# Altium PCB PCB1.PcbDoc
Units mil, origin at the board's own origin, x right, y up, seen from the top; angles counter-clockwise.
Board outline 6000 x 4000 mil, 2 copper layers (Top Layer, Bottom Layer); 23 components, 15 nets, 60 pads, 0 vias.
Unrouted connection lines stored in the file: 31.
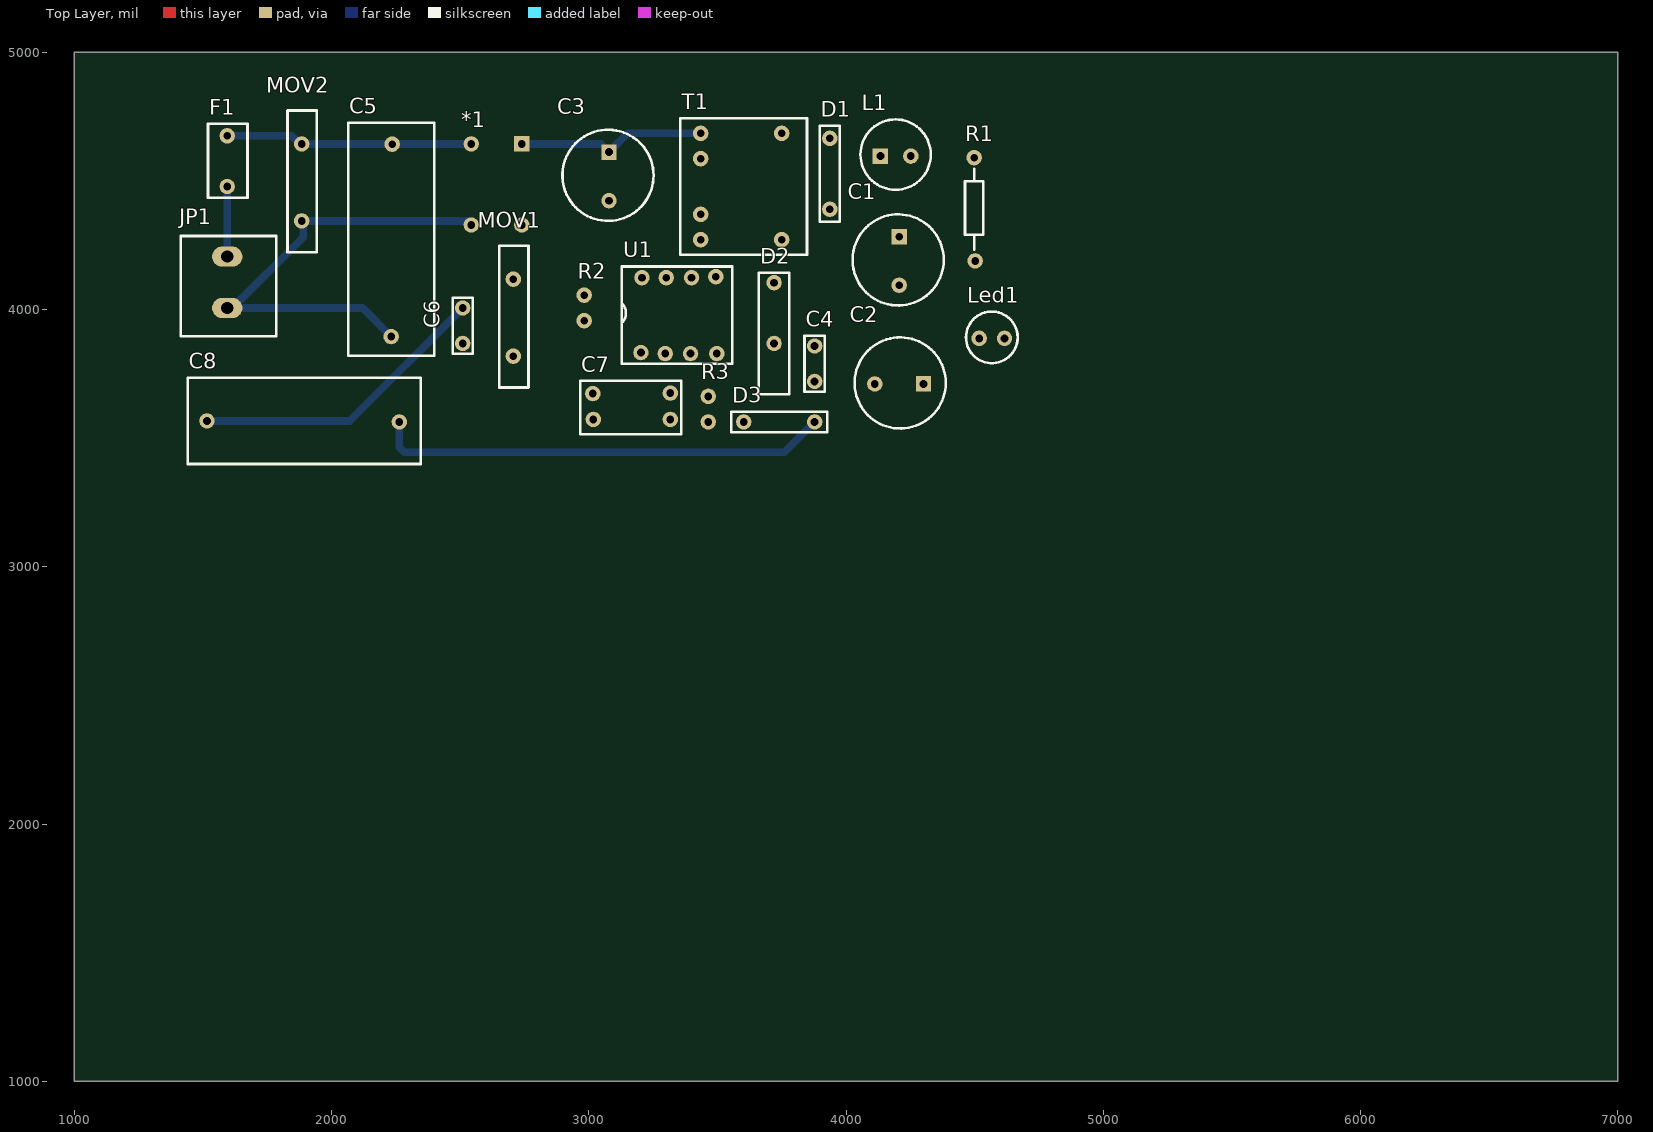
[diagram p0: Top Layer view]
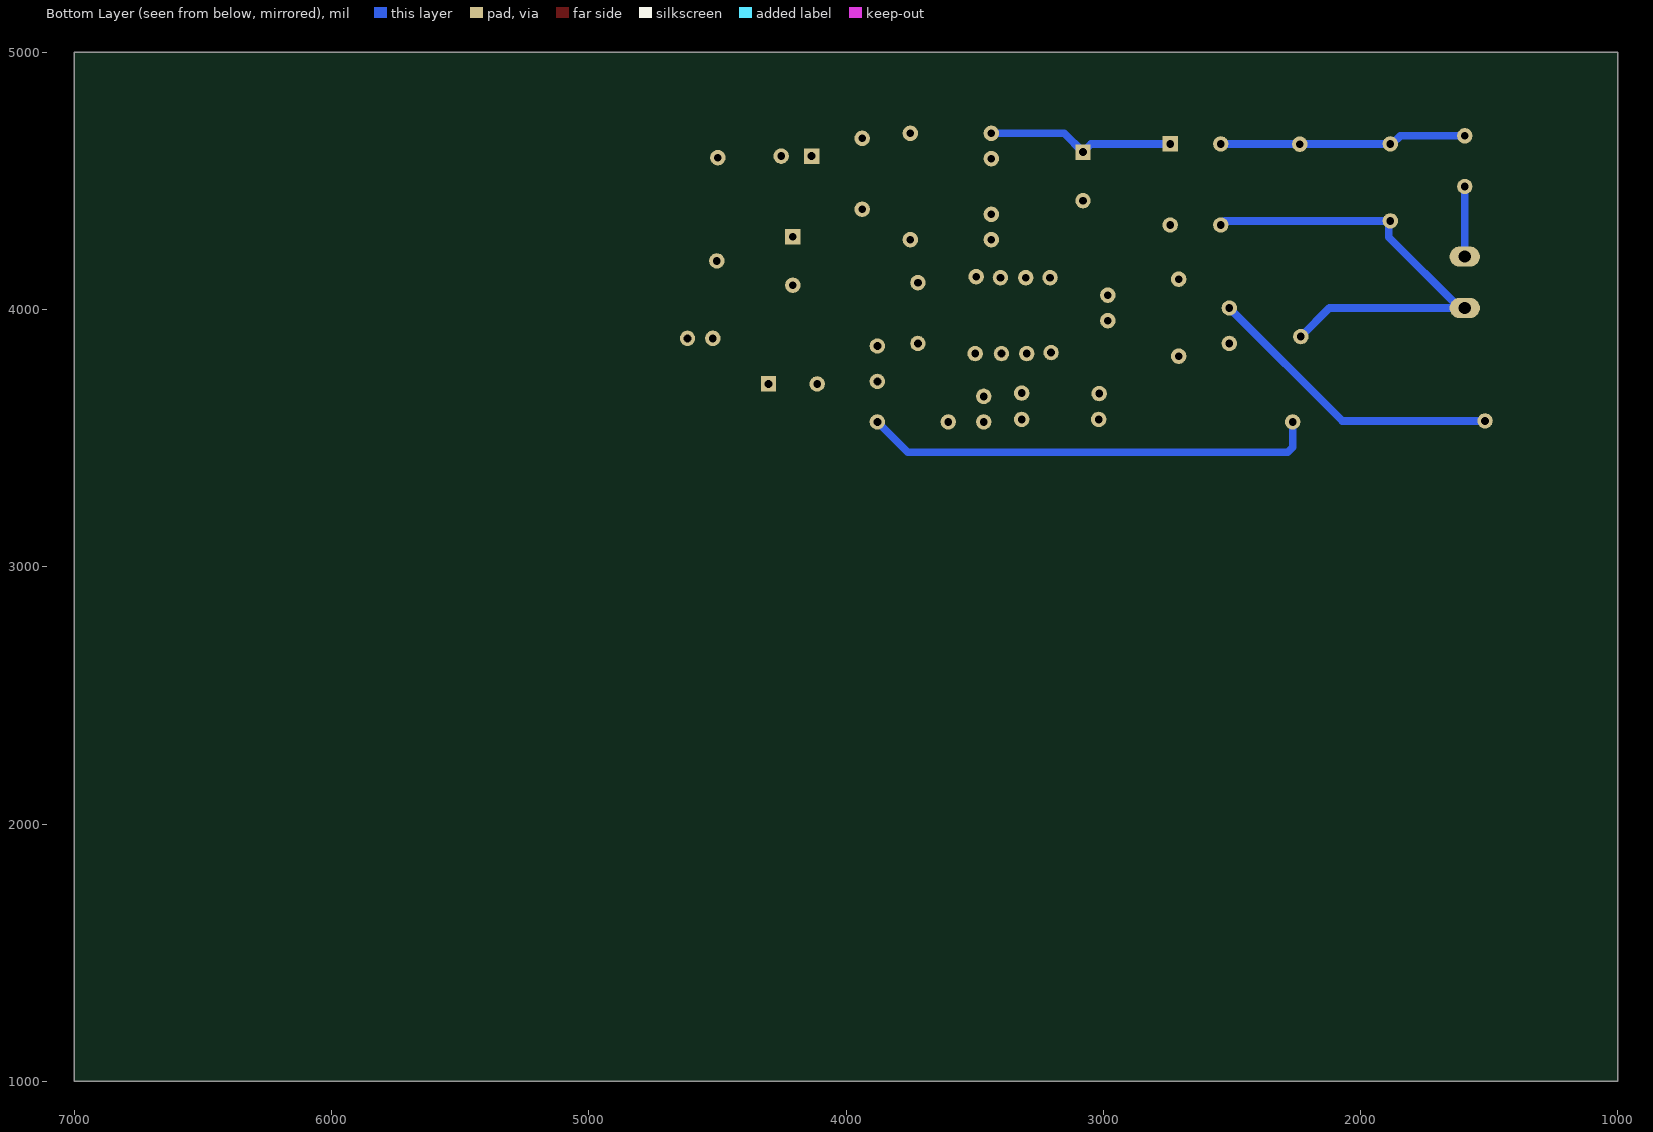
[diagram p1: Bottom Layer view, seen from below]

## Layer stack, top to bottom
Top Solder: solder mask 0.4, Solder Resist, Dk 3.5
Top Layer: signal copper 1.4
Dielectric 1: dielectric 12.6, FR-4, Dk 4.8
Bottom Layer: signal copper 1.4
Bottom Solder: solder mask 0.4, Solder Resist, Dk 3.5

## Board outline
1000,1000 7000,1000 7000,5000 1000,5000

## Design rules (kind name [scope] priority, off if disabled: settings)
Clearance [All] p1: gap=10 ignorepadtopadclearanceinfootprint=FALSE except(0: Arc-Hole Track-Hole SMDPad-Hole THPad-Hole Via-Hole Fill-Hole Poly-Hole Region-Hole Text-Hole)
PolygonConnect [All] p1: connectstyle=Relief reliefconductorwidth=10 reliefentries=4 polygonreliefangle="90 Angle" airgapwidth=10
RoomDefinition Sheet1 [InComponentClass('Sheet1')] p1: confinementstyle=ConfineIn formatcopy=TRUE lockcomponents=FALSE outline 0,0 2000,0 2000,1000 0,1000
RoutingVias [All] p1: holewidth=28 width=50 viastyle="Through Hole" minholewidth=28 minwidth=50 maxholewidth=28 maxwidth=50
SolderMaskExpansion [All] p1: expansion=4
Width [All] p1: maxlimit=40 minlimit=10 preferedwidth=15
30 further rules are at their usual default settings.

## Components (designator, comment, footprint, x,y, rotation, side; value= is the part's Value field where it differs from the comment)
*1 "Bridge diode" "bridge diode - duplicate" 2228.1,4525.59 r0 top
C1 "1000uF" "Capacitor 1000uF 25V" 4202.76,4192.91 r270 top
C2 "1000uF" "Capacitor 1000uF 25V" 4210.63,3714.57 r180 top
C3 "1000uF" "Capacitor 1000uF 25V" 3074.8,4521.65 r270 top
C4 "104" "Capacitor 104" 3877.95,3720.47 r270 top
C5 "104" "Capactor cbb" 2227.8,3894.84 r270 top
C6 "104" "Capacitor 104" 2509.84,4005.91 r90 top
C7 "Opto" Opto 3320.87,3574.8 r180 top
C8 "104" "Capactor cbb" 1515.75,3570.87 r180 top
D1 "Diode zenner" "Diode Zenner" 3937.01,4667.32 r90 top
D2 "1n4007" "Diode 1N4007" 3720.47,3907.48 r270 top
D3 "Diode zenner" "Diode Zenner" 3879.92,3562.99 r0 top
F1 "Fuse" Fuse 1594.49,4596.46 r90 top
JP1 "Header kf128" "Terminal 2" 1594.49,4205.91 r270 top
L1 "Inductor" "RLB 0712 Inductor" 4133.86,4592.52 r180 top
Led1 "Led" "LED RED" 4616.14,3887.8 r0 top
MOV1 "300 V" "Varistor 10d471k" 2702.76,3972.44 r90 top
MOV2 "300 V" "Varistor 10d471k" 1879.92,4498.03 r90 top
R1 "1k" "Resistor 1/4w" 4498.03,4389.76 r90 top
R2 "1k" "Resistor 1/4w - duplicate" 3037.41,4067.8 r90 top
R3 "1k" "Resistor 1/4w - duplicate" 3409.45,3551.18 r270 top
T1 "Transformer" Transformer 3631.89,4468.5 r0 top
U1 "TNY268PN" TNY268pn 3344.49,3986.22 r90 top

## Footprints (in the part's own frame and the unit in brackets; to place one, negate y for a bottom-side part, rotate by r counter-clockwise, add the part's x,y. Pads: shape width x height; smd on the part's side, far side on the other; paste and mask are expansions set on the pad)
"bridge diode - duplicate" [mil] "db107"
  rect 60x60 hole 30: 1(511.81,118.11)
  round 60 hole 30: 2(314.96,118.11) 3(314.96,-196.85) 4(511.81,-196.85)
  body extent 266,-197 569,118, height 150
"Capacitor 104" [mil] "Ceramic Capacitor 104"
  round 60 hole 30: 1(0,0) 2(-137.8,0)
  silkscreen extent -177,-39 39,39, body extent -170,-39 24,39, height 59
"Capacitor 1000uF 25V" [mil] "Capacitor 1000uF 25V"
  rect 60x60 hole 30: 1(-90.55,3.94)
  round 60 hole 30: 2(98.43,3.94)
  silkscreen extent -177,-177 177,177, body extent -207,-207 207,207, height 650
"Capactor cbb" [mil] "CBB81 PPS Capacitor W=23.0 H=15.5 T=8.5 P=19.0"
  round 60 hole 30: 1(0,3.94) 2(-748.03,7.87)
  silkscreen extent -831,-163 75,171, body extent -831,-163 75,171, height 433
"Diode 1N4007" [mil]
  round 60 hole 30: 1(-196.85,0) 2(39.37,0)
  silkscreen extent -236,-59 236,59, body extent -220,-54 214,54, height 146
"Diode Zenner" [mil] "Zenner 1N4148"
  round 60 hole 30: 1(-1.97,0) 2(-277.56,0)
  silkscreen extent -327,-39 47,39, body extent -287,-39 8,39, height 98
Fuse [mil]
  round 60 hole 30: 1(-118.11,0) 2(78.74,0)
  silkscreen extent -161,-79 126,75, body extent -195,-79 93,75, height 539
"LED RED" [mil] "LED RED"
  round 60 hole 30: 1(0,0) 2(-98.43,0)
  silkscreen extent -150,-96 51,104, body extent -126,-57 31,81, height 86
Opto [mil] "PC817"
  round 60 hole 30: 1(3.94,1.97) 2(3.94,-100.39) 3(303.15,1.97) 4(305.12,-98.43)
  silkscreen extent -39,-148 354,59, body extent -2,-136 309,45, height 169
"Resistor 1/4w" [mil] "Resistor 1/4w"
  round 60 hole 30: 1(-200.79,-3.94) 2(200.79,0)
  silkscreen extent -157,-35 157,35, body extent -211,-46 213,46, height 155
"Resistor 1/4w - duplicate" [mil] "Resistor 1/4w stand"
  round 60 hole 30: 1(-111.1,55.13) 2(-11.81,55.12)
  body extent -148,18 -2,91, height 285
"RLB 0712 Inductor" [mil] "Inductance range 47µH - 47mH"
  rect 60x60 hole 30: 1(0,-3.94)
  round 60 hole 30: 2(-118.11,-3.94)
  silkscreen extent -196,-147 78,127, body extent -191,-136 73,128, height 906
"Terminal 2" [mm] "KF128-2P 5.08MM"
  oval 2x3 hole 1.2: 1(0,0) 2(5.08,0)
  silkscreen extent -2.03,-4.57 7.87,4.83, body extent -2.42,-5 8.18,5.3, height 14.15
TNY268pn [mil] "TNY268pn 7pin"
  round 60 hole 30: 1(-153.54,141.73) 2(-157.48,47.24) 3(-157.48,-51.18) 4(-157.48,-153.54) 5(141.73,-149.61) 7(137.8,43.31) 8(137.8,-55.12) 8(137.8,137.8)
  silkscreen extent -197,-213 181,217, body extent -163,-213 147,217, height 239
Transformer [mil] "BAX EE10-Q7LK6 pin"
  round 60 hole 30: 1(-196.85,-196.85) 2(-196.85,-98.43) 3(-196.85,118.11) 4(-196.85,216.54) 5(118.11,216.54) 8(118.11,-196.85)
  silkscreen extent -276,-256 217,276, body extent -276,-193 217,233, height 421
"Varistor 10d471k" [mil] "Varistor 10d471k"
  round 60 hole 30: 1(-153.54,-3.94) 2(145.67,-3.94)
  silkscreen extent -276,-63 276,51, body extent -316,-144 316,144, height 768

## Part data
C1 C2 C3: library part "Capacitor Pol", "Capacitor Pol"
C4 C5 C6 C8: library part Capactor
C7: "PC817"
D2: library part Diode, "diode 1n4007"
JP1: "Header kf128 banlinhkien"
Led1: "Led Red"
MOV1 MOV2: library part "Varistor 10d471k", "Varistor mov 10d471k   12 - 300 V"
R1 R2 R3: library part Resister, "Resister"
T1: "BAX EE10-Q7LK6 pin"

## Nets (pads, with @x,y where several pads share a name; then routed paths per layer and width w, separated by ;. In a path a pad name is that pad's centre, name@x,y a point inside that pad or via, vN(x,y) a via of type N, cw(c..) or ccw(c..) an arc to the next point about the centre after c; other vN are vias at no path point)
GND: C1.2 C2.2 C4.1 C8.2 D3.1 Led1.2 T1.8 | length 1769.7
  Bottom Layer w30: C8.2 2263.78,3464.57 2283.46,3444.88 3759.84,3444.88 D3.1
Net*1_1: *1.1 C3.1 MOV1.2 R2.2 T1.4 | length 730.2
  Bottom Layer w30: *1.1@2748.03,4643.7 3047.24,4643.7 C3.1 3151.57,4685.04 T1.4
Net*1_2: *1.2 C5.2 F1.2 MOV2.2 | length 970.4
  Bottom Layer w30: F1.2 1844.24,4675.2 1875.74,4643.7 MOV2.2 1884.27,4643.29 2235.26,4643.29 C5.2 2236.5,4643.7 *1.2@2551.18,4643.7
Net*1_3: *1.3 C5.1 JP1.2 MOV2.1 | length 1812.3
  Bottom Layer w30: JP1.2 JP1.2@1614.17,4005.91 ; C5.1 2120.67,4005.91 JP1.2@1614.17,4005.91 ; *1.3@2551.18,4328.74 *1.3 2527.32,4344.49 MOV2.1 1889.76,4338.58 1889.76,4281.5 JP1.2@1614.17,4005.91
Net*1_4: *1.4 C3.2 C6.1 C7.3 C8.1 U1.2 U1.3 U1.7 U1.8 | length 1175.9
  Bottom Layer w30: C8.1 2070.87,3566.93 C6.1
NetC1_1: C1.1 C7.1 D1.2 L1.1
NetC2_1: C2.1 C4.2 L1.2 R1.2
NetC6_2: C6.2 U1.1
NetC7_2: C7.2 D3.2 R3.1
NetC7_4: C7.4 U1.4
NetD1_1: D1.1 T1.5
NetD2_1: D2.1 T1.3 U1.5
NetD2_2: D2.2 MOV1.1 R2.1
NetF1_1: F1.1 JP1.1 | length 272.4
  Bottom Layer w30: JP1.1 F1.1
NetLed1_1: Led1.1 R1.1
pads on no net: R3.2 T1.1 T1.2